# EAGLE board monostable (EAGLE 6.5.0)
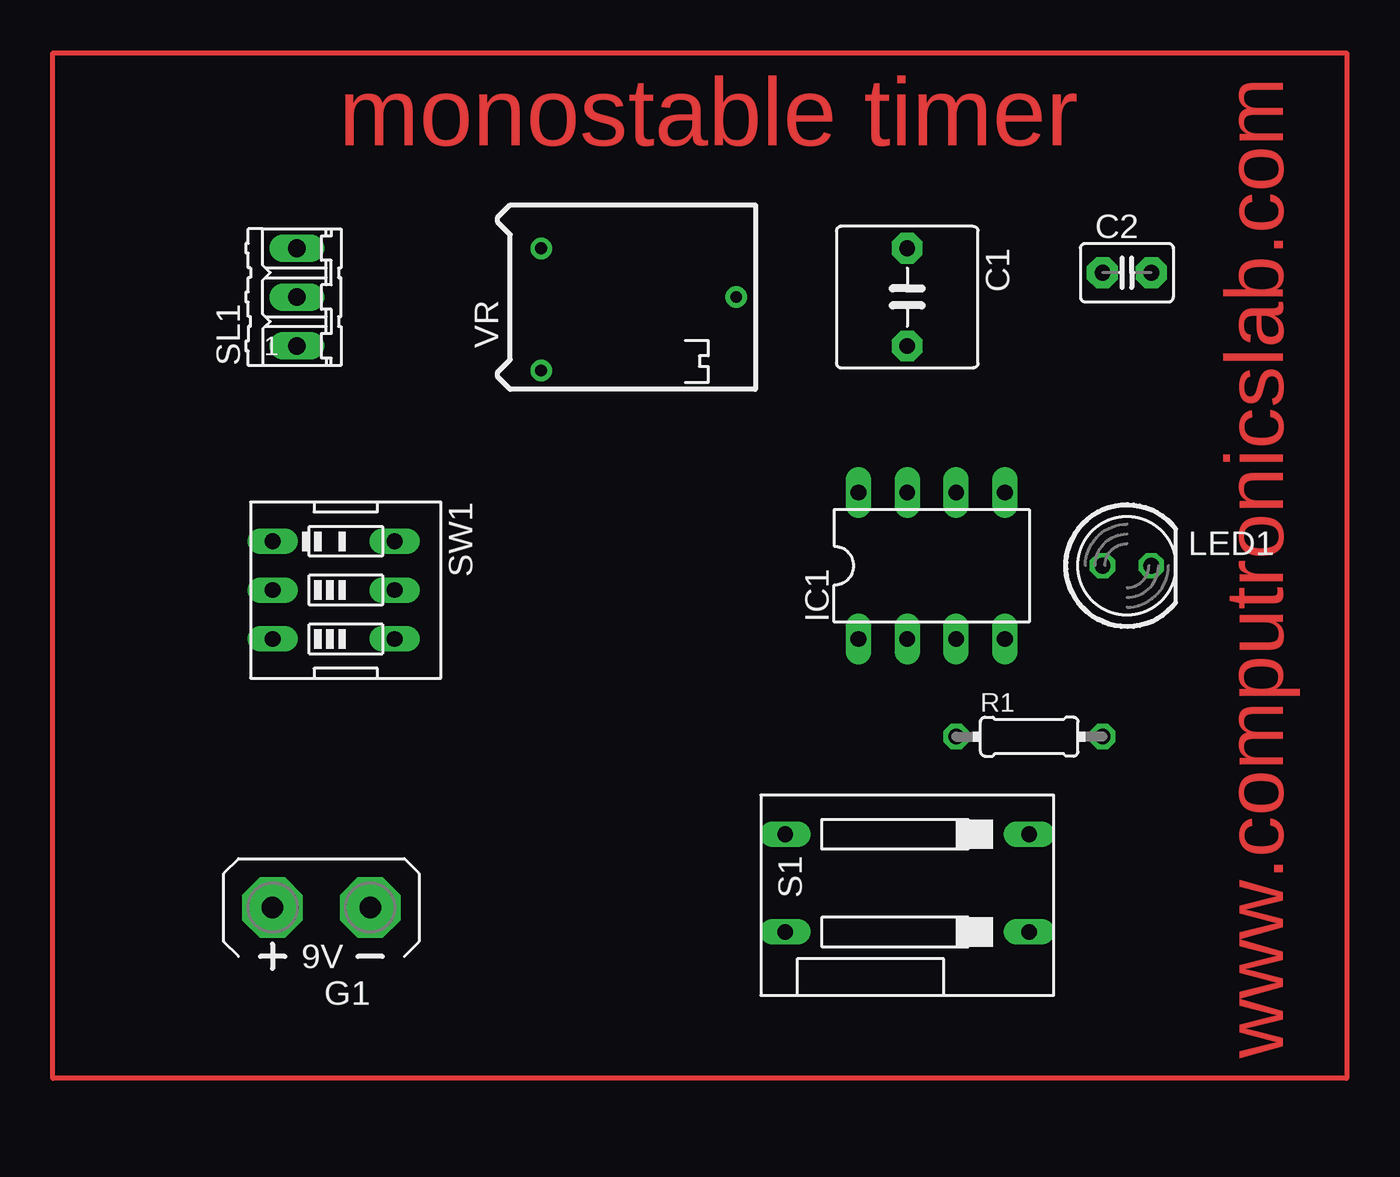
[diagram p0: board, top side]
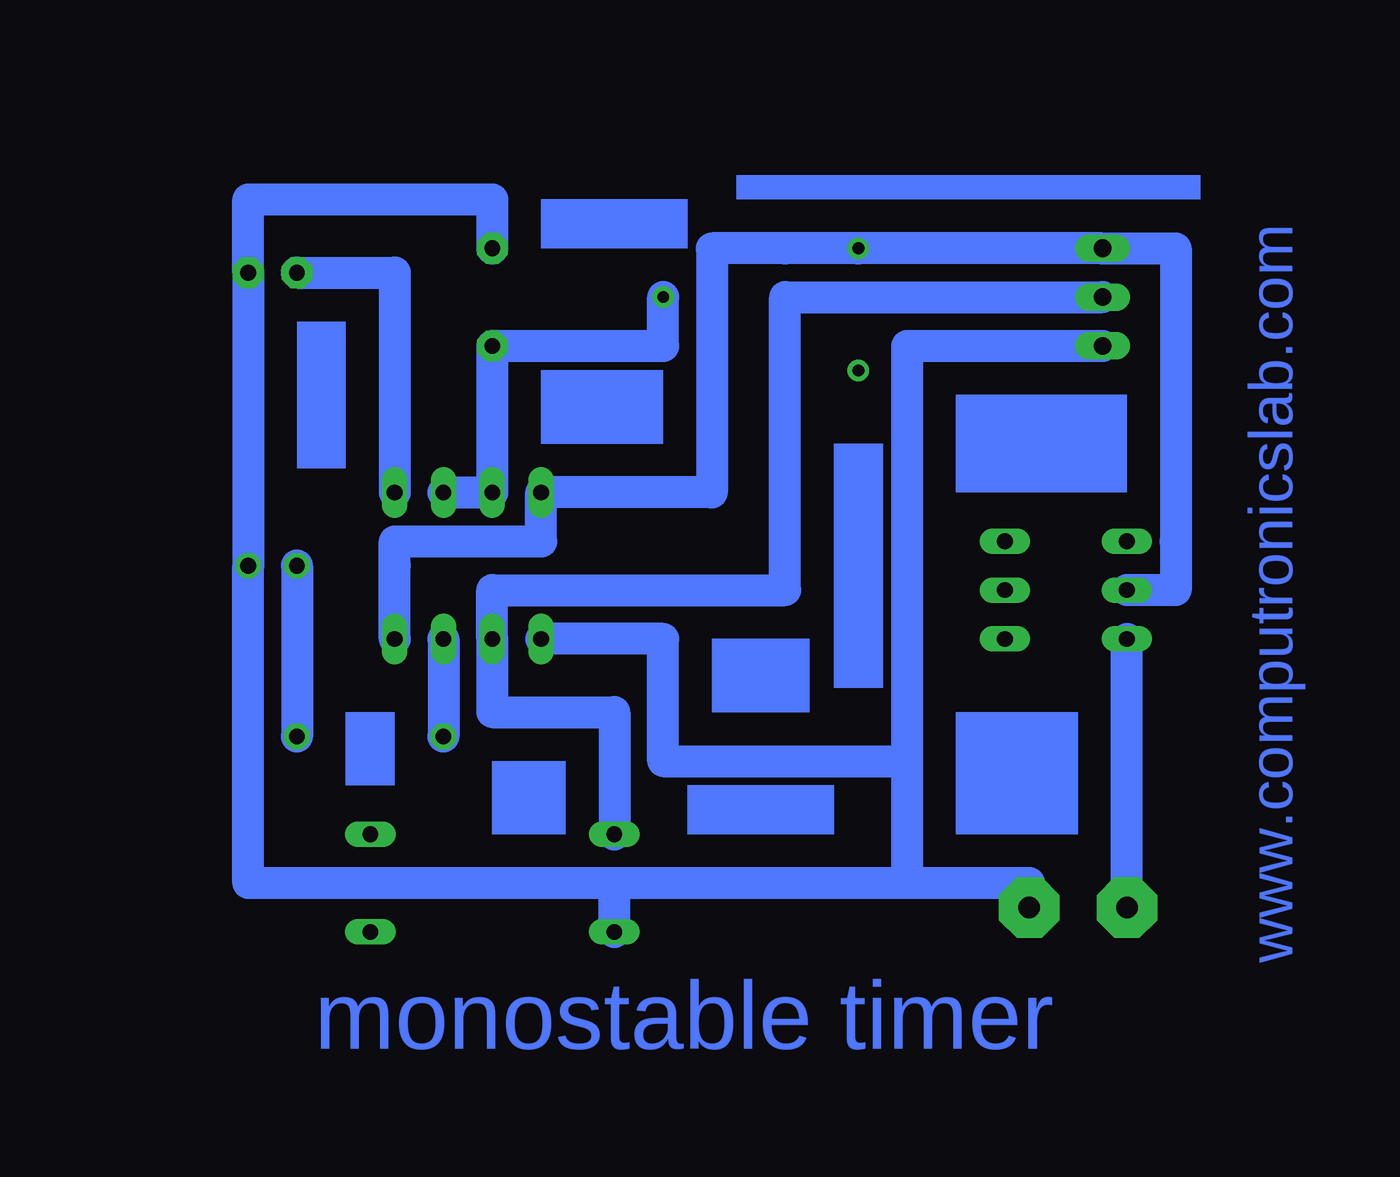
[diagram p1: board, bottom side, seen from below]

No outline drawn. Coordinates in mm, seen from the top.
Copper layers (1*16): Top 0.035mm / dielectric 1.5mm / Bottom 0.035mm
Design rules "default": minimum track width 10mil, minimum drill 24mil, track to track 8mil, track to pad 8mil, pad to pad 8mil, via to via 8mil, smd to smd 8mil, copper to edge 40mil, drill to drill 8mil, minimum pad ring 10mil, minimum via ring 8mil, stop-mask expansion 4mil, vias tented up to drill 0mil, thermal gap 10mil

## Footprints (pad centres in the part's own frame; a part is rotated, then mirrored left to right if it is on the bottom)
C5B7.2 = drill 0.813 pad 1.6 octagon: 1 -2.54,0; 2 2.54,0
C2.5-3 = drill 0.813 pad 1.6 octagon: 1 -1.27,0; 2 1.27,0
AB9V = drill 1.118 pad 3.15 octagon: + 0,2.54; - 0,-2.54
DIL-08 = drill 0.813 long: 1 -3.81,-3.81; 2 -1.27,-3.81; 3 1.27,-3.81; 4 3.81,-3.81; 5 3.81,3.81; 6 1.27,3.81; 7 -1.27,3.81; 8 -3.81,3.81
LED5MM = drill 0.813 octagon: A -1.27,0; K 1.27,0
0204/7 = drill 0.813 octagon: 1 -3.81,0; 2 3.81,0
DS-02 = drill 0.813 long: 1 -5.08,-6.35; 2 0,-6.35; 3 0,6.35; 4 -5.08,6.35
03P = drill 0.914 long: 1 -2.54,0; 2 0,0; 3 2.54,0
EDG-03 = drill 0.813 long: 1 -2.54,-3.81; 2 0,-3.81; 3 2.54,-3.81; 4 2.54,2.54; 5 0,2.54; 6 -2.54,2.54
RTRIM64P = drill 0.61: 1 -2.54,-3.81; 2 7.62,0; 3 -2.54,2.54

## Placement (x,y rotation side)
C1  100uf  [C5B7.2]  36.83,52.07 270 top
C2  0.1uf  [C2.5-3]  48.26,53.34 0 top
G1  AB9V  [AB9V]  6.35,20.32 90 top
IC1  NE555  [DIL-08]  38.1,38.1 0 top
LED1  5mm  [LED5MM]  48.26,38.1 0 top
R1  330E  [0204/7]  43.18,29.21 0 top
S1  push switch  [DS-02]  36.83,24.13 90 top
SL1  [03P]  5.08,52.07 90 top
SW1  on/off switch  [EDG-03]  7.62,36.83 270 top
VR  100k  [RTRIM64P]  20.32,52.07 0 top

## Library data of the parts
C1 C2 = capacitor-wima
G1 = battery
IC1 = st-microelectronics; MF: Arrow Electronics; MPN: NE555N; OC_FARNELL: 1467742; OC_NEWARK: 89K1486
LED1 = led
R1 = eagle-ltspice; SPICEMODEL: NONE; SPICEPREFIX: R
S1 = switch-dil; OC_FARNELL: 9472126; OC_NEWARK: unknown
SL1 = con-amp-quick; OC_FARNELL: unknown; OC_NEWARK: unknown
SW1 = special
VR = resistor

## Nets
N$1: C1.2 IC1.6 IC1.7 VR.2
N$3: IC1.2 S1.3 SL1.2
N$5: C2.1 IC1.5
N$6: IC1.3 R1.1
N$7: LED1.A R1.2
N$8: G1.+ SW1.3
N$9: C1.1 C2.2 G1.- IC1.1 LED1.K S1.4 SL1.1
N$11: IC1.4 IC1.8 SL1.3 SW1.2 VR.3

## Tracks (layer width: path | path; a pad name or v marks a point on that pad's centre or on a via)
N$1
  Bottom 1.676: IC1.6 IC1.7 C1.2 30.48,49.53 27.94,49.53 VR.2
N$2
  Top 0.254: -7.62,64.77 59.69,64.77 59.69,11.43 -7.62,11.43 -7.62,64.77
N$3
  Bottom 1.676: S1.3 30.48,30.48 36.83,30.48 IC1.2 36.83,36.83 21.59,36.83 21.59,52.07 SL1.2
N$5
  Bottom 1.676: IC1.5 41.91,53.34 C2.1
N$6
  Bottom 1.676: IC1.3 R1.1
N$7
  Bottom 1.676: LED1.A R1.2
N$8
  Bottom 1.676: G1.+ SW1.3
N$9
  Bottom 1.676: C1.1 36.83,57.15 49.53,57.15 C2.2 LED1.K 49.53,21.59 30.48,21.59 | 15.24,21.59 30.48,21.59 | 15.24,21.59 15.24,27.94 | IC1.1 27.94,34.29 27.94,27.94 15.24,27.94 | 15.24,27.94 15.24,49.53 SL1.1 | S1.4 30.48,21.59 | G1.- 8.89,21.59 15.24,21.59
N$11
  Bottom 1.676: IC1.4 41.91,38.1 41.91,39.37 34.29,39.37 IC1.8 25.4,41.91 25.4,54.61 21.59,54.61 VR.3 SL1.3 1.27,54.61 1.27,39.37 1.27,36.83 SW1.2
(copper drawn outside any net)
  shapes: Bottom area x11

## Text on the board
Top: monostable timer | www.computronicslab.com
Bottom: www.computronicslab.com | monostable timer